# Altium PCB Projekat.PcbDoc
Units mil, origin at the board's own origin, x right, y up, seen from the top; angles counter-clockwise.
Board outline 7690 x 4970 mil, 2 copper layers (Top Layer, Bottom Layer); 48 components, 35 nets, 167 pads, 38 vias.
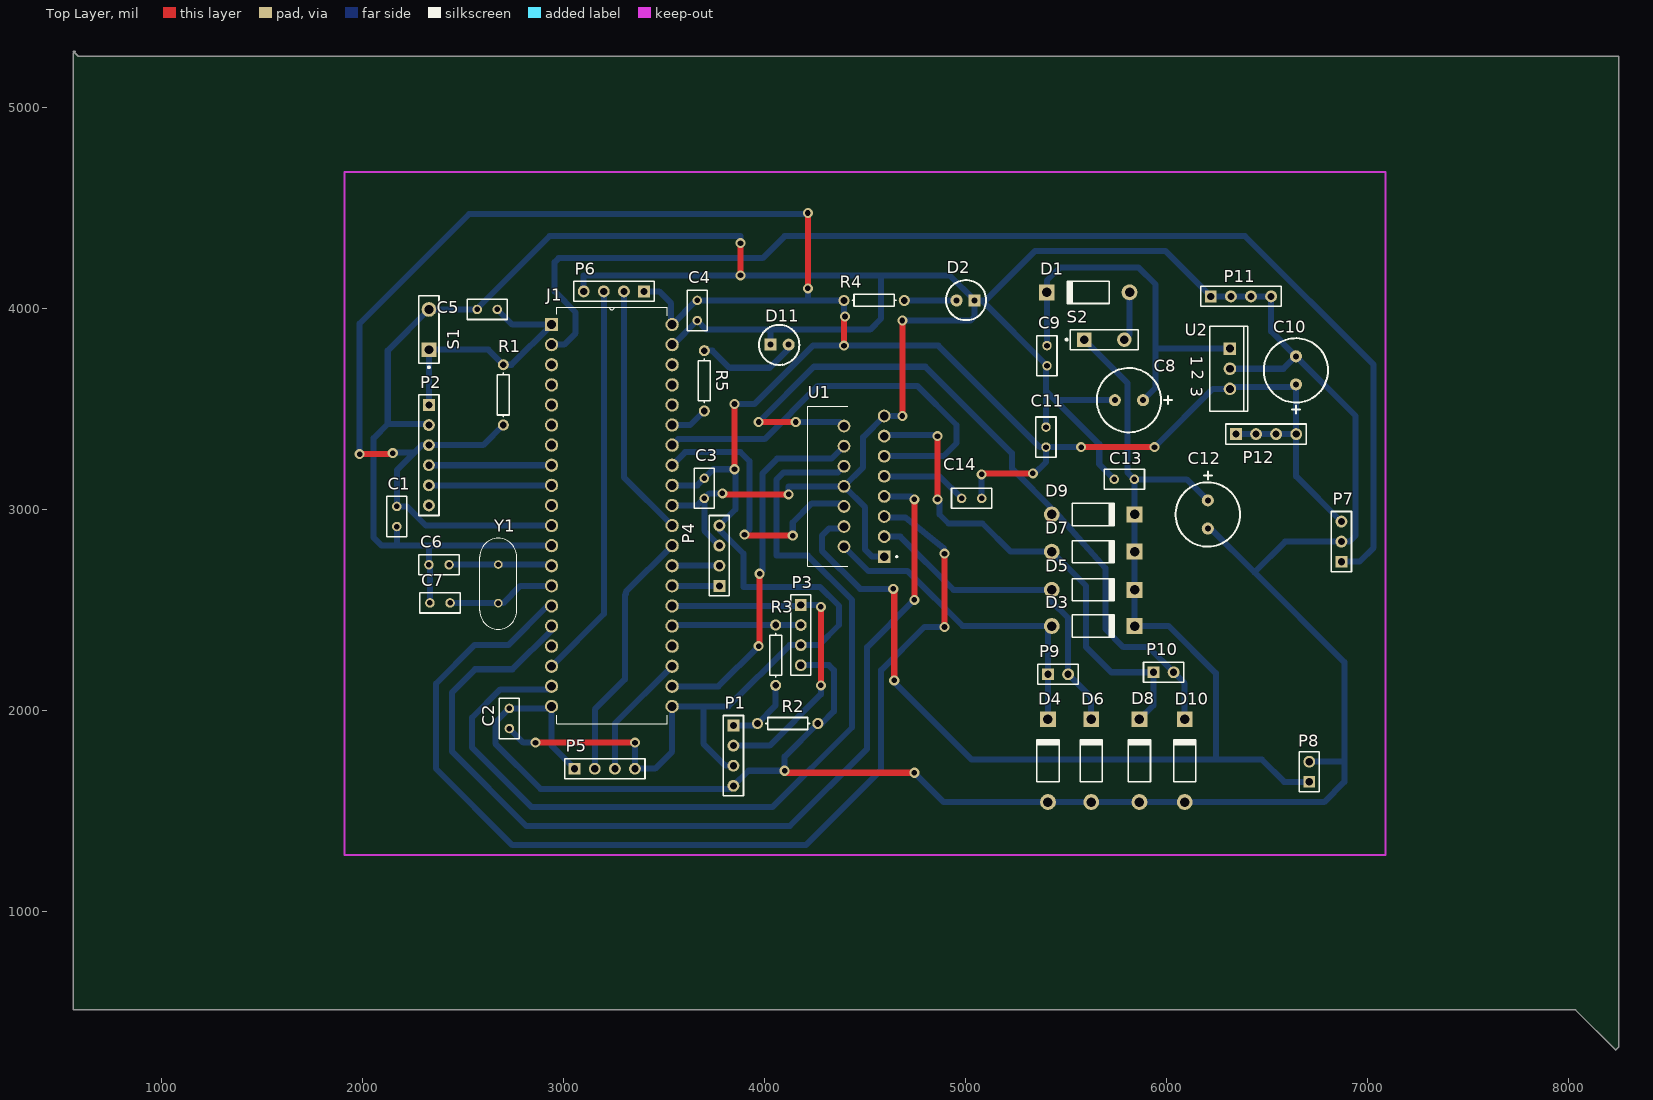
[diagram p0: Top Layer view]
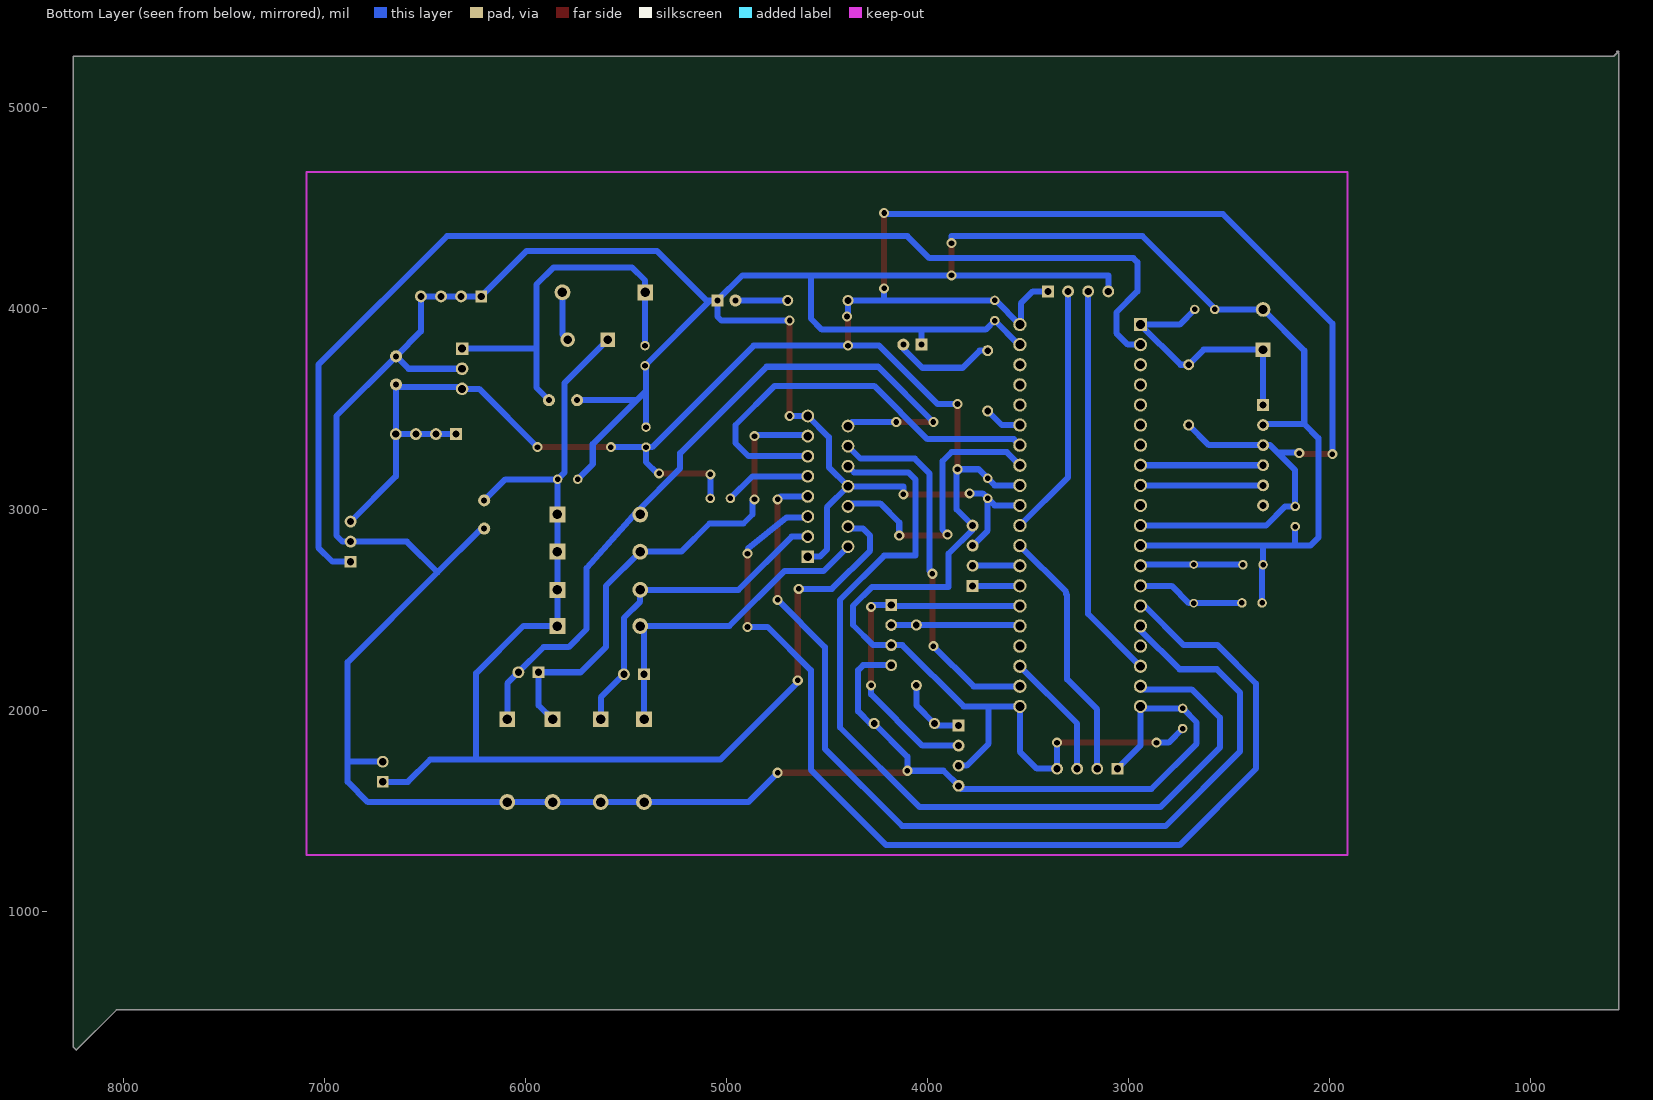
[diagram p1: Bottom Layer view, seen from below]

## Layer stack, top to bottom
Top Solder: solder mask 0.4, Solder Resist, Dk 3.5
Top Layer: signal copper 1.4
Dielectric 1: dielectric 12.6, FR-4, Dk 4.8
Bottom Layer: signal copper 1.4
Bottom Solder: solder mask 0.4, Solder Resist, Dk 3.5

## Board outline
560,5280 585,5255 8250,5255 8250,325 8235,310 8035,510 560,510 560,5270 570,5280

## Design rules (kind name [scope] priority, off if disabled: settings)
Clearance [All] p1: gap=8 ignorepadtopadclearanceinfootprint=FALSE
PolygonConnect [All] p1: connectstyle=Relief reliefconductorwidth=10 reliefentries=4 polygonreliefangle="90 Angle" airgapwidth=10
RoutingVias [All] p1: holewidth=28 width=50 viastyle="Through Hole" minholewidth=28 minwidth=50 maxholewidth=28 maxwidth=50
SolderMaskExpansion [All] p1: expansion=4
Width signal [All] p1: maxlimit=35 minlimit=15 preferedwidth=30
Width power [All] p2: maxlimit=45 minlimit=15 preferedwidth=40
30 further rules are at their usual default settings.

## Components (designator, comment, footprint, x,y, rotation, side; value= is the part's Value field where it differs from the comment)
C1 "Cap" RAD-0.1 2170,2965 r90 top value=100nF
C2 "Cap" RAD-0.1 2730,1960 r270 top value=100nF
C3 "Cap" RAD-0.1 3700,3105 r90 top value=100nF
C4 "Cap" RAD-0.1 3665,3990 r90 top value=100nF
C5 "Cap" RAD-0.1 2620,3995 r180 top value=100nF
C6 "Cap" RAD-0.1 2380,2725 r0 top value=22pF
C7 "Cap" RAD-0.1 2385,2535 r180 top value=22pF
C8 "Cap Pol1" "Elektrolitski kondenzator" 5815,3545 r180 top value=470uF
C9 "Cap" RAD-0.1 5405,3765 r90 top value=100nF
C10 "Cap Pol1" "Elektrolitski kondenzator" 6645,3690 r90 top value=470uF
C11 "Cap" RAD-0.1 5400,3360 r270 top value=100nF
C12 "Cap Pol1" "Elektrolitski kondenzator" 6203.58,2977.13 r270 top value=470uF
C13 "Cap" RAD-0.1 5790,3150 r180 top value=100nF
C14 "Cap" RAD-0.1 5030,3055 r180 top value=100nF
D1 "Diode 1N4007" DO-41 5610,4080 r180 top
D2 "LED1" Diode 5000,4045 r180 top
D3 "Diode" DO-41 5635,2420 r0 top
D4 "Diode" DO-41 5410,1750 r90 top
D5 "Diode" DO-41 5635,2600 r0 top
D6 "Diode" DO-41 5625,1750 r90 top
D7 "Diode" DO-41 5635,2790 r0 top
D8 "Diode" DO-41 5865,1750 r90 top
D9 "Diode" DO-41 5635,2975 r0 top
D10 "Diode" DO-41 6090,1750 r90 top
D11 "LED1" Diode 4075,3815 r0 top
J1 "DSPIC30F4013-30I/P" DIP254P1524X482-40 3540,2020 r0 top
P1 "Bluetooth na UART1" HDR1X4 3845,1925 r270 top
P2 "PIC Programator" HDR1X6 2330,3520 r270 top
P3 "UART1" HDR1X4 4180,2525 r270 top
P4 "UART2" HDR1X4 3775,2620 r90 top
P5 "Desni HC-SR04 senzor" HDR1X4 3055,1710 r0 top
P6 "Lijevi HC-SR04 senzor" HDR1X4 3400,4085 r180 top
P7 "IR senzor daljine GP2Y" HDR1X3 6870,2740 r90 top
P8 "Header 2" HDR1X2 6710,1645 r90 top
P9 "M1" HDR1X2 5410,2180 r0 top
P10 "M2" HDR1X2 5935,2190 r0 top
P11 "Header 4" HDR1X4 6220,4060 r0 top
P12 "Header 4" HDR1X4 6345,3375 r0 top
R1 "Res1" AXIAL-0.3 2700,3570 r90 top value=4.7K
R2 "Res1" AXIAL-0.3 4115,1935 r180 top value=10K
R3 "Res1" AXIAL-0.3 4055,2275 r90 top value=4K7
R4 "Res1" AXIAL-0.3 4545,4040 r0 top value=1K
R5 "Res1" AXIAL-0.3 3700,3640 r270 top value=1K
S1 "SW-PB" SPST-2 2330,3895 r90 top
S2 "SW-SPST" SPST-2 5690,3845 r0 top
U1 "L298N" TO127P2020X500X2100-15 4595,2765 r180 top
U2 "LM7805S/NOPB" TO-220-AB 6315,3700 r270 top
Y1 "HC-49/U-S16000000ABJB" XTAL_HC49P488W43L1150T466H350 2675,2630 r270 top

## Footprints (in the part's own frame and the unit in brackets; to place one, negate y for a bottom-side part, rotate by r counter-clockwise, add the part's x,y. Pads: shape width x height; smd on the part's side, far side on the other; paste and mask are expansions set on the pad)
AXIAL-0.3 [mm] "Axial Device, Thru-Hole; 2 Leads; 0.3 in Pin Spacing"
  round 1.4 hole 0.85: 1(-3.81,0) 2(3.81,0)
  silkscreen extent -2.77,-0.76 2.77,0.76
Diode [mil]
  round 60 hole 30: 1(45,5)
  rect 60x60 hole 30: 2(-45,5)
  silkscreen extent -102,-96 98,104
DIP254P1524X482-40 [mil]
  rect 66x66 / inner round 66 / far side rect 66x66 hole 44: 1(-600,1900)
  round 66 hole 44: 2(-600,1800) 3(-600,1700) 4(-600,1600) 5(-600,1500) 6(-600,1400) 7(-600,1300) 8(-600,1200) 9(-600,1100) 10(-600,1000) 11(-600,900) 12(-600,800) 13(-600,700) 14(-600,600) 15(-600,500) 16(-600,400) 17(-600,300) 18(-600,200) 19(-600,100) 20(-600,0) 21(0,0) 22(0,100) 23(0,200) 24(0,300) 25(0,400) 26(0,500) 27(0,600) 28(0,700) 29(0,800) 30(0,900) 31(0,1000) 32(0,1100) 33(0,1200) 34(0,1300) 35(0,1400) 36(0,1500) 37(0,1600) 38(0,1700) 39(0,1800) 40(0,1900)
  silkscreen extent -575,-85 -25,1985, body extent -630,-75 20,1985, height 190
DO-41 [mm] "Diode, Axial; Body 5.2 x 2.7 mm (LxDia. max), Lead Dia. 0.86 mm (max)"
  round 2 hole 1.2: 1(-5.23,0)
  rect 2x2 hole 1.2: 2(5.23,0)
  silkscreen extent -2.65,-1.4 2.75,1.4
"Elektrolitski kondenzator" [mil]
  round 60 hole 30: 1(-67.87,1.42) 2(72.13,1.42)
  silkscreen extent -213,-159 162,161
HDR1X2 [mm] "Connector; Header; 2 Position"
  rect 1.5x1.5 hole 0.9: 1(0,0)
  round 1.5 hole 0.9: 2(2.54,0)
  silkscreen extent -1.27,-1.27 3.81,1.27
HDR1X3 [mm] "Connector; Header; 3 Position"
  rect 1.5x1.5 hole 0.9: 1(0,0)
  round 1.5 hole 0.9: 2(2.54,0) 3(5.08,0)
  silkscreen extent -1.27,-1.27 6.35,1.27
HDR1X4 [mm] "Connector; Header; 4 Position"
  rect 1.5x1.5 hole 0.9: 1(0,0)
  round 1.5 hole 0.9: 2(2.54,0) 3(5.08,0) 4(7.62,0)
  silkscreen extent -1.27,-1.27 8.89,1.27
HDR1X6 [mm] "Connector; Header; 6 Position"
  rect 1.5x1.5 hole 0.9: 1(0,0)
  round 1.5 hole 0.9: 2(2.54,0) 3(5.08,0) 4(7.62,0) 5(10.16,0) 6(12.7,0)
  silkscreen extent -1.27,-1.27 13.97,1.27
RAD-0.1 [mm] "Radial Cap, Thru-Hole; 2 Leads; 0.1 in Pin Spacing"
  round 1.2 hole 0.7: 1(-1.27,0) 2(1.27,0)
  silkscreen extent -2.54,-1.27 2.54,1.27
SPST-2 [mm] "Switch; 2 Leads"
  rect 1.85x1.85 hole 1.1: 1(-2.54,0)
  round 1.85 hole 1.1: 2(2.54,0)
  silkscreen extent -4.89,-1.27 4.28,1.27
TO127P2020X500X2100-15 [mm]
  rect 1.62x1.62 hole 1.08: 1(0,0)
  round 1.62 hole 1.08: 2(5.08,-1.27) 3(0,-2.54) 4(5.08,-3.81) 5(0,-5.08) 6(5.08,-6.35) 7(0,-7.62) 8(5.08,-8.89) 9(0,-10.16) 10(5.08,-11.43) 11(0,-12.7) 12(5.08,-13.97) 13(0,-15.24) 14(5.08,-16.51) 15(0,-17.78)
  silkscreen extent -1.69,-18.99 9.63,1.21
TO-220-AB [mm] "TO, Thru-Hole, Vertical, Heatsink Mounted; 3 In-Line Leads; Pitch 2.54 mm"
  rect 1.6x1.6 hole 1: 1(-2.54,0)
  round 1.6 hole 1: 2(0,0) 3(2.54,0)
  silkscreen extent -5.35,-2.55 5.35,2.25
XTAL_HC49P488W43L1150T466H350 [mm]
  round 1.08 hole 0.68: 1(-2.44,0) 2(2.44,0)
  silkscreen extent -5.75,-2.33 5.75,2.33, body extent -5.75,-2.33 5.75,2.33, height 3.5

## Part data
C1 C2 C3 C4 C5 C6 C7 C9 C11 C13 C14: "Capacitor", LatestRevisionDate=17-Jul-2002, LatestRevisionNote="Re-released for DXP Platform.", PackageDescription="Radial Cap, Thru-Hole; 2 Leads; 0.3 in Pin Spacing", PackageReference=RAD-0.3, Published=8-Jun-2000, Publisher="Altium Limited"
C8 C10 C12: "Polarized Capacitor (Radial)", LatestRevisionDate=17-Jul-2002, LatestRevisionNote="Re-released for DXP Platform.", PackageDescription="Polarized Capacitor (Radial); 2 Leads", PackageReference=RB7.6-15, Published=8-Jun-2000, Publisher="Altium Limited"
D1: "1 Amp General Purpose Rectifier", Code_JEDEC=DO-204-AL, ComponentLink1Description="Manufacturer Link", ComponentLink1URL=http://www.fairchildsemi.com/, ComponentLink2Description=Datasheet, ComponentLink2URL=http://www.fairchildsemi.com/ds/1N%2F1N4001.pdf, DatasheetVersion=1998, LatestRevisionDate=17-Jul-2002, LatestRevisionNote="Re-released for DXP Platform.", PackageDescription="Diode, Axial; Body 5.2 x 2.7 mm (LxDia. max), Lead Dia. 0.86 mm (max)", PackageReference=DO-41, PackageVersion=Aug-1999, Published=8-Jun-2000, Publisher="Altium Limited"
D2 D11: "Typical RED GaAs LED", LatestRevisionDate=08-Jul-2005, LatestRevisionNote="Mech Layer 1 removed.", PackageDescription="LED; 2 Leads", PackageReference=LED-1, Published=8-Jun-2000, Publisher="Altium Limited"
D3 D4 D5 D6 D7 D8 D9 D10: "Default Diode", Code_JEDEC=DO-214-AB, LatestRevisionDate=17-Jul-2002, LatestRevisionNote="Re-released for DXP Platform.", PackageDescription="DO-214-AB/SMC; 2 C-Bend Leads; Body 7.9 x 5.9 mm, inc. leads (LxW)", PackageReference=SMC, PackageVersion=Sep-1996, Published=8-Jun-2000, Publisher="Altium Limited"
J1: "Digital Signal Processors, DSP, DSC General Purpose", Package="DIP-40 Microchip", Check_prices=https://www.snapeda.com/parts/DSPIC30F4013-30I/P/Microchip/view-part/?ref=eda, MF=Microchip, MP=DSPIC30F4013-30I/P, SnapEDA_Link=https://www.snapeda.com/parts/DSPIC30F4013-30I/P/Microchip/view-part/?ref=snap
P1 P3 P4 P5 P6: library part "Header 4", "Header, 4-Pin", LatestRevisionDate=17-Jul-2002, LatestRevisionNote="Re-released for DXP Platform.", Publisher="Altium Limited"
P2: library part "Header 6", "Header, 6-Pin", LatestRevisionDate=17-Jul-2002, LatestRevisionNote="Re-released for DXP Platform.", Publisher="Altium Limited"
P7: library part "Header 3", "Header, 3-Pin", LatestRevisionDate=17-Jul-2002, LatestRevisionNote="Re-released for DXP Platform.", Publisher="Altium Limited"
P8: "Header, 2-Pin", LatestRevisionDate=17-Jul-2002, LatestRevisionNote="Re-released for DXP Platform.", Publisher="Altium Limited"
P9 P10: library part "Header 2", "Header, 2-Pin", LatestRevisionDate=17-Jul-2002, LatestRevisionNote="Re-released for DXP Platform.", Publisher="Altium Limited"
P11 P12: "Header, 4-Pin", LatestRevisionDate=17-Jul-2002, LatestRevisionNote="Re-released for DXP Platform.", Publisher="Altium Limited"
R1 R2 R3 R4 R5: "Resistor", LatestRevisionDate=17-Jul-2002, LatestRevisionNote="Re-released for DXP Platform.", PackageDescription="Axial Device, Thru-Hole; 2 Leads; 0.3 in Pin Spacing", PackageReference=AXIAL-0.3, Published=8-Jun-2000, Publisher="Altium Limited"
S1: "Switch", LatestRevisionDate=17-Jul-2002, LatestRevisionNote="Re-released for DXP Platform.", PackageDescription="Switch; 2 Leads", PackageReference=SPST-2, Published=24-Mar-1999, Publisher="Altium Limited"
S2: "Single-Pole, Single-Throw Switch", LatestRevisionDate=17-Jul-2002, LatestRevisionNote="Re-released for DXP Platform.", PackageDescription="Switch; 2 Leads", PackageReference=SPST-2, Published=24-Mar-1999, Publisher="Altium Limited"
U1: "Dual Full Bridge Motor Driver 15-Pin(15+Tab) MULTIWATT V Tube", Package=None, Availability=Unavailable, MP=L298N, Price=None
U2: "1.5-A, 30-V, linear voltage regulator", Package="TO263-3 Texas Instruments", Check_prices=https://www.snapeda.com/parts/LM7805S/NOPB/Texas+Instruments/view-part/?ref=eda, MF="Texas Instruments", MP=LM7805S/NOPB, SnapEDA_Link=https://www.snapeda.com/parts/LM7805S/NOPB/Texas+Instruments/view-part/?ref=snap
Y1: "16 MHz ±30ppm Crystal 18pF 50 Ohms HC-49/US", Package="HC-49/US Citizen Finetech Miyota", Check_prices=https://www.snapeda.com/parts/HC-49/U-S16000000ABJB/Citizen/view-part/?ref=eda, MF="Citizen Finedevice", MP=HC-49/U-S16000000ABJB, SnapEDA_Link=https://www.snapeda.com/parts/HC-49/U-S16000000ABJB/Citizen/view-part/?ref=snap

## Via types
v1: diameter 50, hole 28, Top Layer to Bottom Layer, 38 vias

## Nets (pads, with @x,y where several pads share a name; then routed paths per layer and width w, separated by ;. In a path a pad name is that pad's centre, name@x,y a point inside that pad or via, vN(x,y) a via of type N, cw(c..) or ccw(c..) an arc to the next point about the centre after c; other vN are vias at no path point)
5V: C1.2 C2.2 C3.2 C4.2 C10.1 C11.2 C14.1 J1.11 J1.21 J1.32 J1.40 P1.3 P2.3 P3.3 P4.4 P5.4 P6.1 P7.3 P12.1 P12.2 P12.3 P12.4 R1.1 R4.1 U2.3 | length 16285.9
  Top Layer w30: v1(1985,3275) 2140,3275 2150,3285 v1(2150,3280) ; v1(2860,1840) v1(3355,1840) ; v1(3850,3200) v1(3850,3525) ; v1(4215,4100) v1(4215,4475) ; v1(4395,3815) 4395,3955 v1(4400,3960) ; v1(5080,3175) 5085,3180 v1(5335,3180) ; v1(5575,3310) v1(5940,3310)
  Bottom Layer w30: v1(1985,3275) 1985,3925 2530,4470 4210,4470 v1(4215,4475) ; v1(2150,3280) 2152.5,3282.5 2257.5,3282.5 ; R1.1 2600,3320 P2.3 2295,3320 2257.5,3282.5 ; C2.2 2800,1840 v1(2860,1840) ; J1.11 2315,2920 2220,3015 C1.2 2170,3195 2257.5,3282.5 ; v1(3355,1840) P5.4 3455,1710 3540,1795 J1.21 3695,2020 ; P6.1 3475,4085 3535,4025 3535,3925 J1.40 3660,4040 C4.2 4215,4040 ; J1.32 3665,3120 C3.2 3745,3200 3835,3200 3850,3185 v1(3850,3200) 3855,3195 3855,3000 P4.4 3775,2900 3895,2780 3895,2615 4275,2615 4370,2520 4370,2425 4270,2325 P3.3 4125,2325 3820,2020 3695,2020 ; P1.3 3805,1725 3695,1835 3695,2020 ; v1(3850,3525) 3950,3525 4240,3815 v1(4395,3815) 4865,3815 5370,3310 C11.2 ; v1(4215,4100) 4215,4040 ; v1(4400,3960) 4395,3965 R4.1 4215,4040 ; C14.1 v1(5080,3175) ; v1(5335,3180) 5345,3180 5400,3235 C11.2 ; v1(5575,3310) C11.2 ; v1(5940,3310) 6230,3600 U2.3 6325,3610 6631.46,3610 C10.1 6643.58,3383.58 P12.4@6635,3375 ; P12.1 P12.2 P12.3 P12.4@6635,3375 ; P7.3 6645,3165 P12.4 P12.4@6635,3375
9V: C12.1 C13.1 D3.2 D5.2 D7.2 D9.2 P8.1 S2.1 U1.4 | length 6245.4
  Top Layer w30: v1(4640,2605) 4645,2600 v1(4645,2150)
  Bottom Layer w30: U1.4 4385,2905 4320,2905 4285,2870 4285,2795 4475,2605 v1(4640,2605) ; v1(4645,2150) 4645,2140 5030,1755 6250,1755 ; S2.1 5805,3630 5805,3185 C13.1 ; C12.1 6100,3150 C13.1 ; P8.1 6585,1645 6475,1755 6250,1755 ; C13.1 5840.91,3149.09 D9.2 D7.2 D5.2 D3.2 6010,2420 6245,2185 6245,1760 6250,1755
A11: J1.17
ECHO1: J1.23 P5.3 | length 628.1
  Bottom Layer w30: P5.3 3255,1935 J1.23
ECHO2: J1.18 P6.3 | length 1972.7
  Bottom Layer w30: J1.18 3200,2480 P6.3
ENA: J1.33 U1.6 | length 1413.6
  Top Layer w30: v1(3900,2875) 3905,2870 v1(4140,2870)
  Bottom Layer w30: J1.33 3605,3285 3880,3285 3925,3240 3925,2900 v1(3900,2875) ; v1(4140,2870) 4140,2935 4235,3030 4380,3030 U1.6
ENB: J1.34 U1.11 | length 2094.9
  Bottom Layer w30: J1.34 3570,3350 4000,3350 4265,3615 4760,3615 4955,3420 4955,3330 4890,3265 U1.11
GND: C1.1 C2.1 C3.1 C4.1 C5.2 C6.1 C7.2 C8.2 C9.1 C10.2 C11.1 C12.2 C13.2 D2.2 D4.1 D6.1 D8.1 D10.1 D11.2 J1.12 J1.20 J1.31 J1.39 P1.4 P2.2 P3.4 P4.3 P5.1 P6.4 P7.2 P8.2 P11.1 P11.2 P11.3 P11.4 R2.1 S1.2 U1.1 U1.8 U1.15 U2.2 | length 24599.6
  Top Layer w30: v1(3790,3080) 3795,3075 v1(4120,3075) ; v1(3880,4165) v1(3880,4325) ; v1(4100,1700) 4110,1690 v1(4745,1690) ; v1(4685,3465) v1(4685,3940)
  Bottom Layer w30: C1.1 2170,2825 2175,2820 ; P2.2 2325,3425 2125,3425 ; C7.2 2335,2720 C6.1 2330,2815 2325,2820 ; J1.12 2325,2820 ; P5.1 2940,1825 J1.20 2930,2010 C2.1 2660,1940 2660,1835 2885,1610 3830,1610 P1.4 3920,1700 v1(4100,1700) 4100,1770 R2.1 4285,1935 4345,1995 4345,2200 4320,2225 P3.4 ; P6.4 3100,4165 v1(3880,4165) 4575,4165 ; J1.31 3665,3020 C3.1 ; J1.39 3545,3820 C4.1 3710,3895 4030,3895 ; P4.3 3700,2895 C3.1 ; v1(3790,3080) 3725,3080 C3.1 ; v1(3880,4325) 3880,4360 2930,4360 2570,4000 C5.2 S1.2 2125,3790 2125,3425 ; D11.2 4030,3895 ; v1(4120,3075) 4120,3115 U1.8 ; U1.1 4535,2765 4500,2800 4500,3010 U1.8 ; v1(4685,3465) U1.15 4490,3360 4490,3210 U1.8 ; v1(4685,3940) 5025,3940 5045,3960 D2.2 ; v1(4745,1690) 4890.91,1544.09 D4.1 D6.1 D8.1 D10.1 6784.09,1544.09 6885,1645 6885,1745 ; C11.1 5400,3710 C9.1 5080,4040 ; 5405,3585 5446.42,3543.58 ; C13.2 5665,3225 5665,3325 5446.42,3543.58 ; C8.2 5446.42,3543.58 ; C12.2 6220,2905 6437.5,2687.5 ; U2.2@6320,3705 U2.2 6581.46,3700 C10.2 ; P8.2 6885,1745 ; 2125,3425 2055,3355 2055,2860 2095,2820 2175,2820 ; 2175,2820 2325,2820 ; 4030,3895 4525,3895 4580,3950 4580,4165 4920,4165 D2.2 ; D2.2 5080,4040 ; 5080,4040 5100,4040 5345,4285 5995,4285 P11.1 P11.2 P11.3 P11.4 6520,3885.71 C10.2 ; 6437.5,2687.5 6885,2240 6885,1745 ; 6437.5,2687.5 6590,2840 P7.2 6910,2840 6940,2870 6940,3465.71 C10.2
IN1: J1.15 U1.5 | length 5330.5
  Top Layer w30: v1(4895,2415) v1(4895,2780)
  Bottom Layer w30: J1.15 2920,2520 2725,2325 2556.26,2325 2365,2133.74 2365,1710 2745,1330 4205,1330 4580,1705 4580,2200 4795,2415 v1(4895,2415) ; U1.5 4600,2960 4700,2960 4893,2805.07 4893.67,2804.47 v1(4895,2780)
IN2: J1.16 U1.7 | length 4810.3
  Top Layer w30: v1(4745,2550) v1(4745,3050)
  Bottom Layer w30: J1.16 2940,2400 2745,2205 2560,2205 2445,2090 2445,1795 2815,1425 4126.1,1425 4510,1808.9 4510,2315 v1(4745,2550) ; U1.7 4730,3065 v1(4745,3050)
IN3: J1.22 U1.12 | length 1842
  Top Layer w30: v1(3970,2320) 3975,2325 v1(3975,2680)
  Bottom Layer w30: J1.22 3770,2120 v1(3970,2320) ; v1(3975,2680) 3990,2695 3990,3180 4063,3253 4333,3253 U1.12
IN4: J1.19 U1.10 | length 4628.1
  Bottom Layer w30: J1.19 2925,2105 2685,2105 2545,1965 2545,1815 2840,1520 4040,1520 4435,1915 4435,2550 4215,2770 4060,2770 4060,3150 4095,3185 4365,3185 U1.10
MCLR: C5.1 J1.1 P2.1 R1.2 S1.1 | length 1300
  Bottom Layer w30: P2.1 S1.1 2625,3795 R1.2 2740,3720 J1.1 2745,3920 C5.1
NetC8_1: C8.1 C9.2 D1.2 U2.1 | length 1900
  Bottom Layer w30: C9.2 5404.09,3815.91 D1.2 5404.09,4139.09 5470,4205 5860,4205 5945,4120 5945,3800 ; C8.1 5945,3605.71 5945,3800 ; U2.1 5945,3800
NetC14_2: C14.2 U1.9 | length 430.6
  Bottom Layer w30: U1.9 4870,3165 C14.2
NetD1_1: D1.1 S2.2 | length 245.7
  Bottom Layer w30: S2.2 5815.91,3870.91 D1.1
NetD2_1: D2.1 R4.2 | length 260
  Bottom Layer w30: R4.2 D2.1
NetD3_1: D3.1 D4.2 P9.1 U1.2 | length 1683.9
  Bottom Layer w30: U1.2@4385,2805 U1.2 4517,2693 4712,2693 4985,2420 D3.1 5410,2400.91 P9.1 D4.2
NetD5_1: D5.1 D6.2 P9.2 U1.3 | length 1690.3
  Bottom Layer w30: U1.3 4675,2865 4940,2600 D5.1 5429.09,2540.91 5510,2460 P9.2 5625,2065 D6.2 D6.2@5640,1970.91
NetD7_1: D7.1 D8.2 P10.1 U1.13 | length 2495.4
  Top Layer w30: v1(4860,3050) v1(4860,3365)
  Bottom Layer w30: U1.13 4600.93,3370.93 4854.07,3370.93 v1(4860,3365) ; v1(4860,3050) 4870,3040 4870,2975 4915,2930 5084.09,2930 5224.09,2790 D7.1 5600,2619.09 5600,2315 5725,2190 P10.1 5935,2025.91 D8.2
NetD9_1: D9.1 D10.2 P10.2 U1.14 | length 3730.7
  Top Layer w30: v1(3970,3435) v1(4155,3435)
  Bottom Layer w30: v1(3970,3435) 4245,3710 4800,3710 5230,3280 5230,3204.09 5444.09,2990 5444.89,2989.11 5695,2709.09 5695,2405 5785,2315 5910,2315 P10.2 6090,2135 D10.2 ; v1(4155,3435) 4375,3435 U1.14
NetD11_1: D11.1 R5.1 | length 514.6
  Bottom Layer w30: R5.1 3740,3790 3825,3705 4025,3705 4120,3800 D11.1
NetJ1_2: J1.2 P7.1 | length 6032.8
  Bottom Layer w30: J1.2 3002.53,3820 3060,3877.47 3060,3980 2955,4085 2955,4230 2975,4250 3990,4250 4100,4360 6390,4360 7030,3720 7030,2810 6960,2740 P7.1
NetJ1_8: J1.8 P2.4 | length 610
  Bottom Layer w30: P2.4 J1.8
NetJ1_9: J1.9 P2.5 | length 610
  Bottom Layer w30: P2.5 J1.9
NetJ1_35: J1.35 R5.2 | length 189
  Bottom Layer w30: J1.35 3630,3420 R5.2
NetP1_1: P1.1 R2.2 R3.1 | length 351.4
  Bottom Layer w30: P1.1 3955,1925 R2.2 4055,2025 R3.1
OSC1: C6.2 J1.13 Y1.1 | length 513
  Bottom Layer w30: C6.2 2431.06,2726.06 Y1.1 2933.94,2726.06 J1.13
OSC2: C7.1 J1.14 Y1.2 | length 541.1
  Bottom Layer w30: C7.1 2673.94,2535 Y1.2 2698.94,2533.94 2785,2620 J1.14
TRIGG1: J1.29 P5.2 | length 1269.5
  Bottom Layer w30: P5.2 3155,2005 3305,2155 3305,2575 3310,2580 3310,2590 J1.29
TRIGG2: J1.30 P6.2 | length 1264.4
  Bottom Layer w30: P6.2 3300,3160 J1.30
U1RX: J1.26 P1.2 P3.1 | length 1721.8
  Top Layer w30: v1(4280,2125) v1(4280,2515)
  Bottom Layer w30: J1.26 4175,2520 P3.1 4270,2525 v1(4280,2515) ; P1.2 4025,1825 4280,2080 v1(4280,2125)
U1TX: J1.25 P3.2 R3.2 | length 642.1
  Bottom Layer w30: J1.25 3545,2425 R3.2 P3.2
U2RX: J1.28 P4.2 | length 235
  Bottom Layer w30: J1.28 P4.2
U2TX: J1.27 P4.1 | length 235
  Bottom Layer w30: J1.27 P4.1
pads on no net: J1.3 J1.4 J1.5 J1.6 J1.7 J1.10 J1.24 J1.36 J1.37 J1.38 P2.6

## Keep-outs
Keep-Out Layer:
  lines w10: 1910,1280 3090,1280 6040,1280 7090,1280 7090,4372.5 7090,4680 1910,4680 1910,4310 1910,4265 1910,1280

## Text inside footprints (layer, text, board x,y; h text height)
U2: Top Overlay "1" at 6120,3765 h59.06 r270; Top Overlay "2" at 6125,3695 h59.06 r270; Top Overlay "3" at 6120,3610 h59.06 r270